# EAGLE board Heart 5x5 LED Matrix (EAGLE 9.7.0)

Size 120.82 x 100.94 mm. Coordinates in mm from the lower left corner, seen from the top.
Outline: 0,0 120.82,0 120.82,100.94 0,100.94 0,0
Copper layers (1*16): Top 0.035mm / dielectric 1.5mm / Bottom 0.035mm
Design rules "default": minimum track width 6mil, minimum drill 0.35mm, track to track 6mil, track to pad 6mil, pad to pad 6mil, via to via 6mil, smd to smd 6mil, copper to edge 40mil, drill to drill 6mil, minimum pad ring 10mil, minimum via ring 8mil, stop-mask expansion 4mil, vias tented up to drill 0mil, thermal gap 10mil

## Footprints (pad centres in the part's own frame; a part is rotated, then mirrored left to right if it is on the bottom)
LEDRD254W60D565H860B = drill 0.981 pad 1.581: 1 -1.27,0; 2 1.27,0
RESAD1016W63L850D250B = drill 0.83 pad 1.43: 1 -5.08,0; 2 5.08,0
ARDUINO-UNO-R3-SHIELD = drill 1.016 pad 1.88: 3.3V 24.13,-2.54; 5V 24.13,0; A0 24.13,12.7; A1 24.13,15.24; A2 24.13,17.78; A3 24.13,20.32; A4 24.13,22.86; A5 24.13,25.4; AREF -24.13,-13.97; D2 -24.13,20.32; D3 -24.13,17.78; D4 -24.13,15.24; D5 -24.13,12.7; D6 -24.13,10.16; D7 -24.13,7.62; D8 -24.13,3.81; D9 -24.13,1.27; D10 -24.13,-1.27; D11 -24.13,-3.81; D12 -24.13,-6.35; D13 -24.13,-8.89; GND@0 24.13,2.54; GND@1 24.13,5.08; GND@2 -24.13,-11.43; IOREF 24.13,-7.62; NC 24.13,-10.16; RES 24.13,-5.08; RX -24.13,25.4; SCL -24.13,-19.05; SDA -24.13,-16.51; TX -24.13,22.86; VIN 24.13,7.62

## Placement (x,y rotation side)
D4  RED  [LEDRD254W60D565H860B]  82.64,92.78 180 top
D5  RED  [LEDRD254W60D565H860B]  90.26,92.78 180 top
D6  RED  [LEDRD254W60D565H860B]  97.88,92.78 180 top
D7  RED  [LEDRD254W60D565H860B]  105.26,92.78 180 top
D8  RED  [LEDRD254W60D565H860B]  112.39,93.03 180 top
D12  RED  [LEDRD254W60D565H860B]  82.64,84.66 180 top
D13  RED  [LEDRD254W60D565H860B]  90.26,84.66 180 top
D14  RED  [LEDRD254W60D565H860B]  97.88,84.66 180 top
D15  RED  [LEDRD254W60D565H860B]  105.5,84.66 180 top
D16  RED  [LEDRD254W60D565H860B]  113.12,84.66 180 top
D20  RED  [LEDRD254W60D565H860B]  82.64,76.53 180 top
D21  RED  [LEDRD254W60D565H860B]  90.26,76.53 180 top
D22  RED  [LEDRD254W60D565H860B]  97.88,76.53 180 top
D23  RED  [LEDRD254W60D565H860B]  105.5,76.53 180 top
D24  RED  [LEDRD254W60D565H860B]  113.12,76.53 180 top
D28  RED  [LEDRD254W60D565H860B]  82.64,68.4 180 top
D29  RED  [LEDRD254W60D565H860B]  90.26,68.4 180 top
D30  RED  [LEDRD254W60D565H860B]  97.88,68.4 180 top
D31  RED  [LEDRD254W60D565H860B]  105.5,68.4 180 top
D32  RED  [LEDRD254W60D565H860B]  113.12,68.4 180 top
D36  RED  [LEDRD254W60D565H860B]  82.64,60.27 180 top
D37  RED  [LEDRD254W60D565H860B]  90.26,60.27 180 top
D38  RED  [LEDRD254W60D565H860B]  97.88,60.27 180 top
D39  RED  [LEDRD254W60D565H860B]  105.5,60.27 180 top
D40  RED  [LEDRD254W60D565H860B]  113.12,60.27 180 top
R1  220  [RESAD1016W63L850D250B]  83.99,52.59 90 top
R2  220  [RESAD1016W63L850D250B]  91.51,48.86 90 top
R3  220  [RESAD1016W63L850D250B]  99.14,48.76 90 top
R4  220  [RESAD1016W63L850D250B]  106.83,48.7 90 top
R5  220  [RESAD1016W63L850D250B]  114.49,49.13 90 top
R6  220  [RESAD1016W63L850D250B]  67.46,60.31 0 top
R7  220  [RESAD1016W63L850D250B]  68.01,68.24 0 top
R8  220  [RESAD1016W63L850D250B]  68.01,76.38 0 top
R9  220  [RESAD1016W63L850D250B]  68.22,84.61 0 top
R10  220  [RESAD1016W63L850D250B]  67.67,92.46 0 top
U1  ARDUINO-UNO-R3-SHIELD  [ARDUINO-UNO-R3-SHIELD]  47.88,29.84 270 top

## Library data of the parts
D4-D8 D12-D16 D20-D24 D28-D32 D36-D40 = Tinkercad; CATEGORY: Opto-Electronic; SUB-CATEGORY: LED; VALUE: LED_RED
R1-R10 U1 = Tinkercad

## Nets
D4_A: D4.1 D12.1 D20.1 D28.1 D36.1 R1.2
D4_C: D4.2 D5.2 D6.2 D7.2 D8.2 R10.2
D5_A: D5.1 D13.1 D21.1 D29.1 D37.1 R2.2
D8_A: D8.1 D16.1 D24.1 D32.1 D40.1 R5.2
D12_C: D12.2 D13.2 D14.2 D15.2 D16.2 R9.2
D20_C: D20.2 D21.2 D22.2 D23.2 D24.2 R8.2
D32_C: D28.2 D29.2 D30.2 D31.2 D32.2 R7.2
D36_C: D36.2 D37.2 D38.2 D39.2 D40.2 R6.2
D38_A: D6.1 D14.1 D22.1 D30.1 D38.1 R3.2
D39_A: D7.1 D15.1 D23.1 D31.1 D39.1 R4.2
U1_A1: R5.1 U1.A1
U1_A2: R4.1 U1.A2
U1_A3: R3.1 U1.A3
U1_A4: R2.1 U1.A4
U1_D2: R1.1 U1.D2
U1_D9: R6.1 U1.D9
U1_D10: R7.1 U1.D10
U1_D11: R8.1 U1.D11
U1_D12: R9.1 U1.D12
U1_D13: R10.1 U1.D13

## Tracks (layer width: path | path; a pad name or v marks a point on that pad's centre or on a via)
D4_A  (5 unrouted)
D4_C  (5 unrouted)
D5_A  (5 unrouted)
D8_A  (5 unrouted)
D12_C  (5 unrouted)
D20_C  (5 unrouted)
D32_C  (5 unrouted)
D36_C  (5 unrouted)
D38_A  (5 unrouted)
D39_A  (5 unrouted)
U1_A1  (1 unrouted)
U1_A2  (1 unrouted)
U1_A3  (1 unrouted)
U1_A4  (1 unrouted)
U1_D2  (1 unrouted)
U1_D9  (1 unrouted)
U1_D10  (1 unrouted)
U1_D11  (1 unrouted)
U1_D12  (1 unrouted)
U1_D13  (1 unrouted)